# Altium PCB FPGA-Oscilloscope-route-01.PcbDoc (part 1 of 4)
Units mil, origin at the board's own origin, x right, y up, seen from the top; angles counter-clockwise.
Board outline 8300 x 5800 mil, 2 copper layers (Top Layer, Bottom Layer); 257 components, 397 nets, 1971 pads, 530 vias.
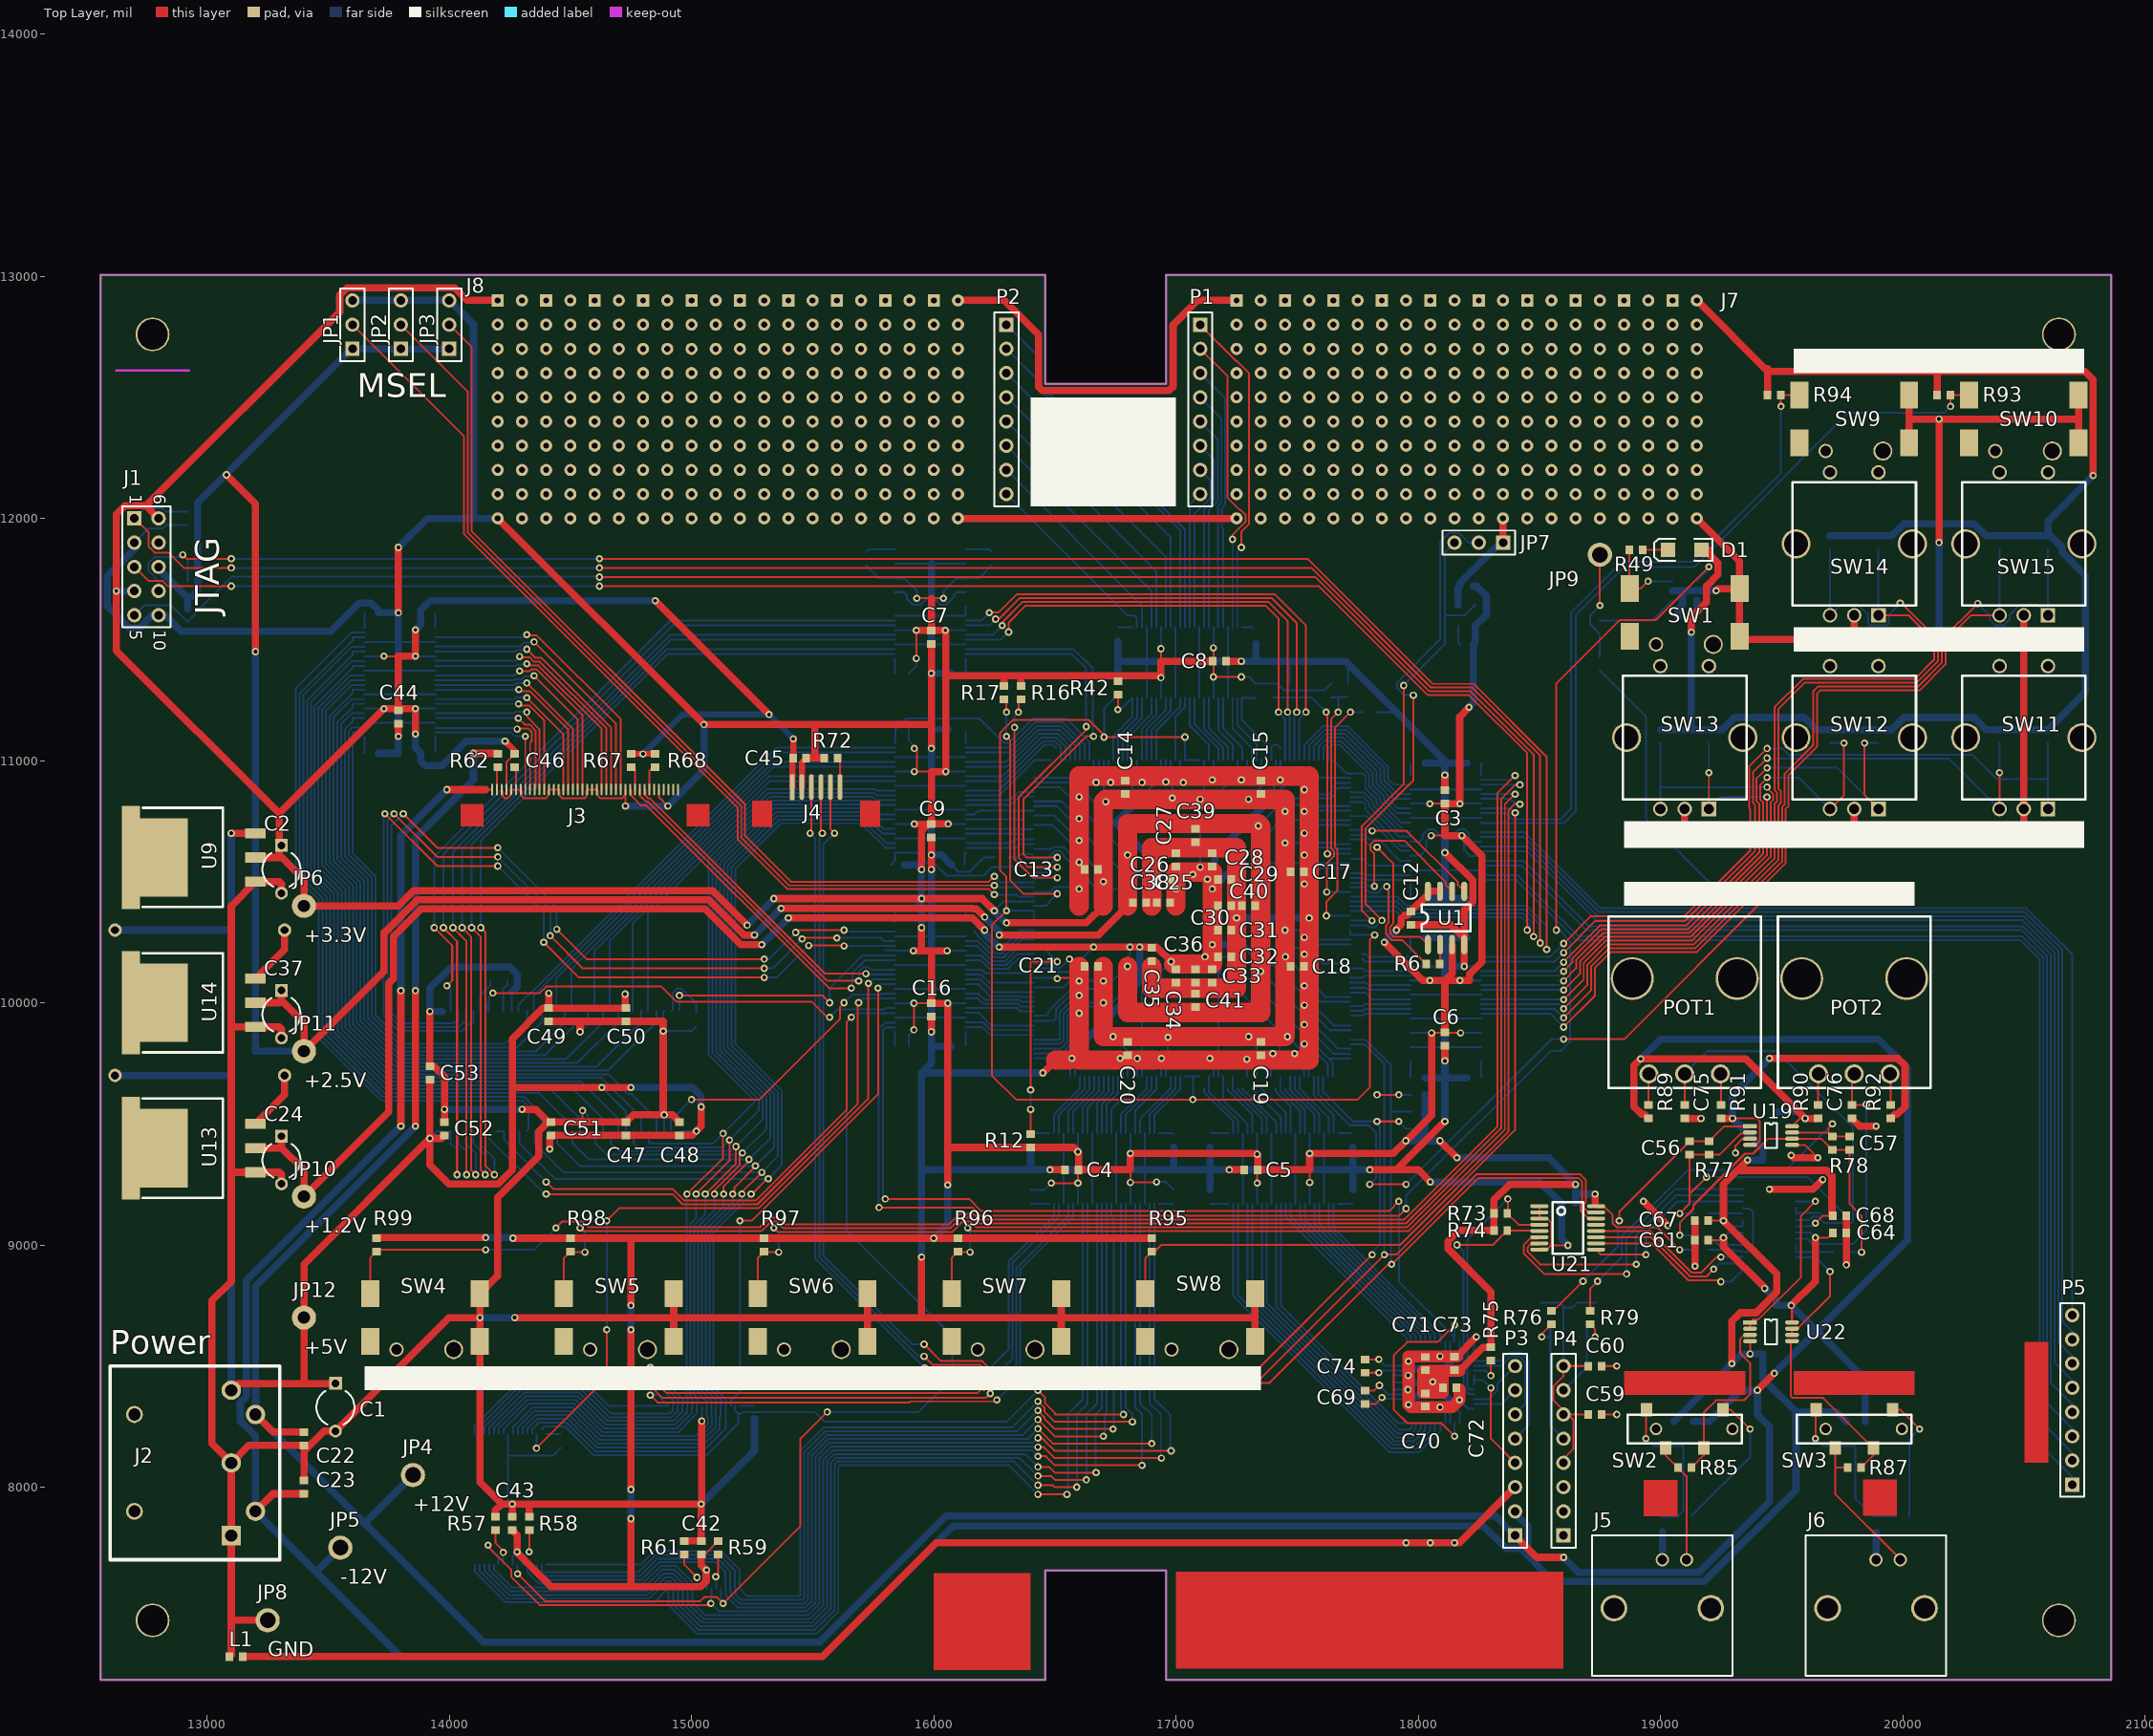
[diagram p0: Top Layer view]
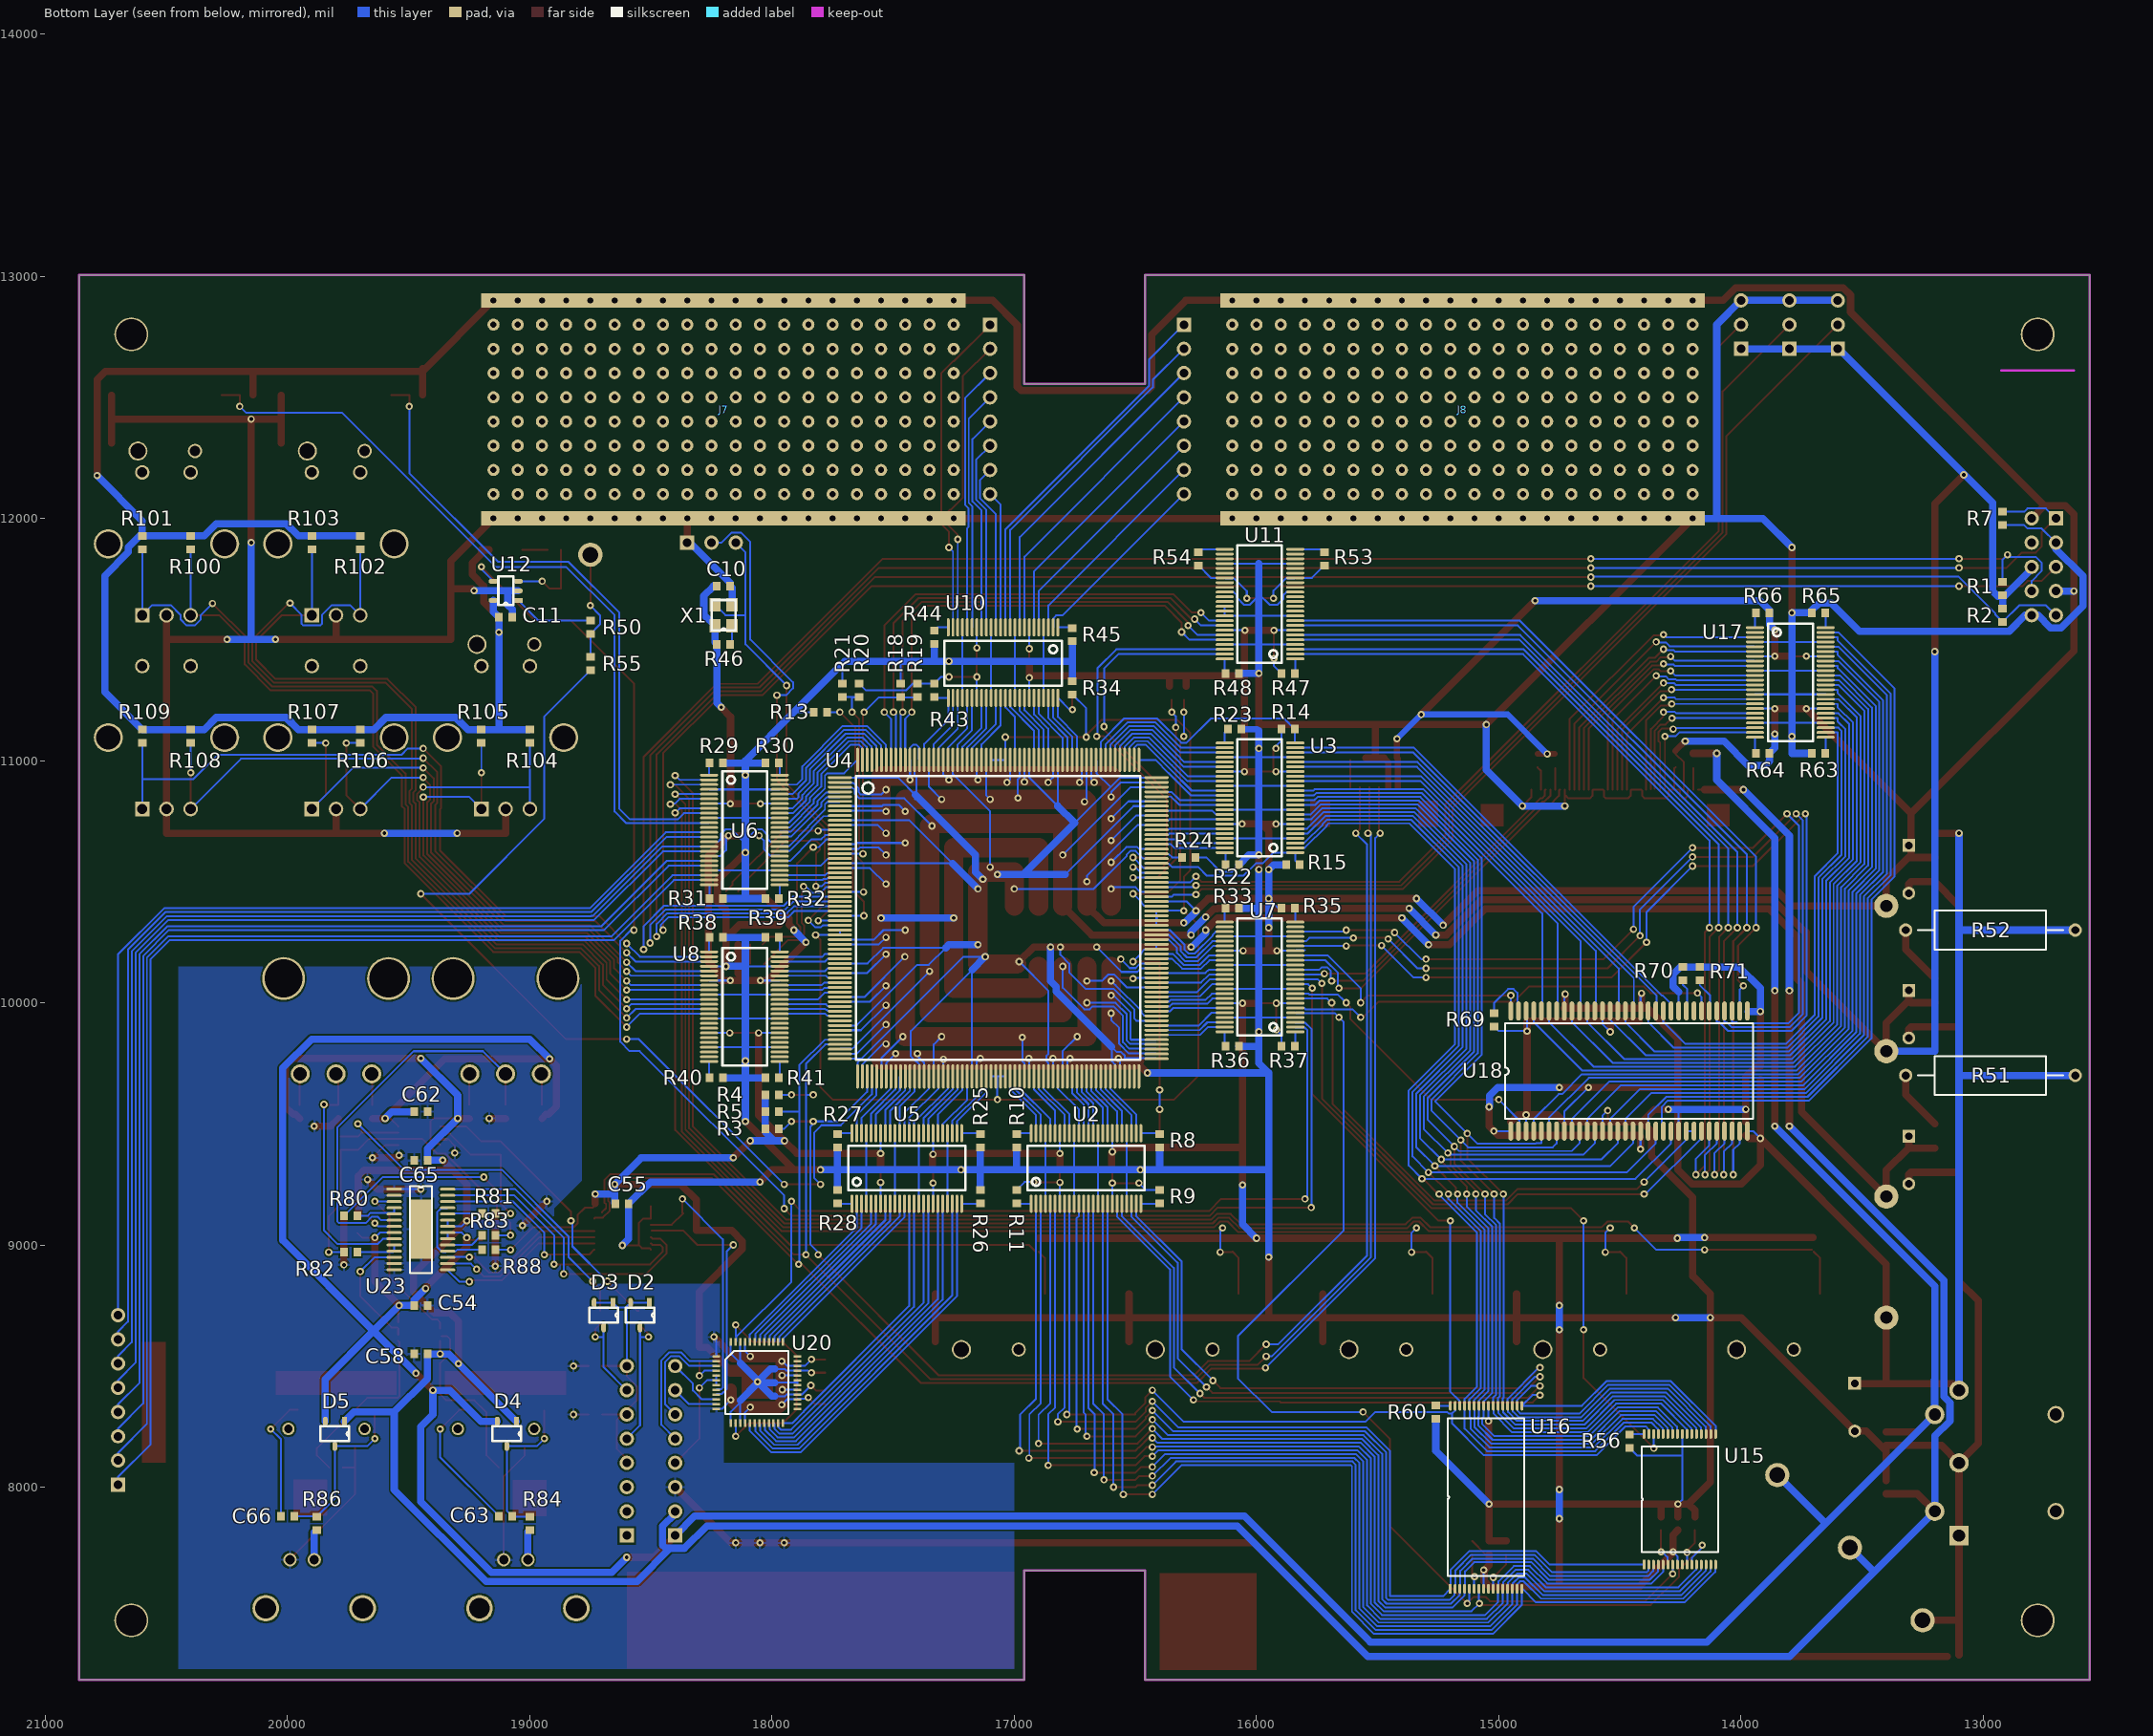
[diagram p1: Bottom Layer view, seen from below]

## Layer stack, top to bottom
Top Layer: signal copper 1.4
Dielectric: dielectric 12.6, FR-4, Dk 4.8
Bottom Layer: signal copper 1.4

## Board outline
12560,7205 12560,13005 16460,13005 16460,12555 16960,12555 16960,13005 20860,13005 20860,7205 16960,7205 16960,7655 16460,7655 16460,7205

## Design rules (kind name [scope] priority, off if disabled: settings)
Clearance [All] p1: gap=7.8
HoleSize [All] p1: absolutevalues=TRUE maxlimit=200 minlimit=1 maxpercent=80.000 minpercent=20.000
MinimumAnnularRing [All] p1: minimumring=7
MinimumSolderMaskSliver [All] p1: minsoldermaskwidth=1.5
PolygonConnect [All] p1: connectstyle=Relief reliefconductorwidth=10 reliefentries=4 polygonreliefangle="90 Angle" airgapwidth=10
RoutingVias [All] p1: holewidth=15 width=30 viastyle="Through Hole" minholewidth=15 minwidth=30 maxholewidth=15 maxwidth=30
SMDNeckDown [All] p1: percent=100.000
SilkToSilkClearance [All] p1 off: silktosilkclearance=10
SilkToSolderMaskClearance [IsPad] p1 off: minsilkscreentomaskgap=10 clearancetoexposedcopper=TRUE
SolderMaskExpansion [All] p1: expansion=4
Width Power [(InNet('GND') OR InNet('V12+') OR InNet('V12-') OR InNet('VCC') OR InNet('VCC5+') OR InNet('VCCA') OR InNet('VCCINT')) OR InNet('AGND')] p1: maxlimit=100 minlimit=8 preferedwidth=30 checkconnectedcopper=TRUE
Width [All] p2: maxlimit=30 minlimit=7.8 preferedwidth=7.8
24 further rules are at their usual default settings.

## Components (designator, comment, footprint, x,y, rotation, side; value= is the part's Value field where it differs from the comment)
C1 "47uF" CAPR5-4X5 13530,8330 r270 top
C2 "47uF" CAPR5-4X5 13307.09,10551.18 r270 top
C3 "0.1uF" 1608[0603] 18110,10850 r270 top
C4 "0.1uF" 1608[0603] 16570,9310 r0 top
C5 "0.1uF" 1608[0603] 17310,9310 r0 top
C6 "0.1uF" 1608[0603] 18110,9850 r90 top
C7 "0.1uF" 1608[0603] 15990,11510 r90 top
C8 "0.1uF" 1608[0603] 17180,11410 r180 top
C9 "0.1uF" 1608[0603] 15990,10710 r90 top
C10 "0.1uF" 1608[0603] 18200,11720 r0 bottom
C11 "0.1uF" 1608[0603] 19100,11591.65 r0 bottom
C12 "0.1uF" 1608[0603] 17970,10350 r90 top
C13 "0.1uF" 1608[0603] 16650,10550 r0 top
C14 "0.1uF" 1608[0603] 16790,10890 r270 top
C15 "0.1uF" 1608[0603] 17350,10890 r270 top
C16 "0.1uF" 1608[0603] 15990,9970 r90 top
C17 "0.1uF" 1608[0603] 17500,10540 r180 top
C18 "0.1uF" 1608[0603] 17500,10150 r180 top
C19 "0.1uF" 1608[0603] 17350,9810 r90 top
C20 "0.1uF" 1608[0603] 16800,9810 r90 top
C21 "0.1uF" 1608[0603] 16650,10150 r0 top
C22 "10uF" 1608[0603] 13400,8200 r90 top
C23 "10uF" 1608[0603] 13400,8000 r270 top
C24 "47uF" CAPR5-4X5 13307.09,9350.39 r270 top
C25 "0.1uF" 1608[0603] 16948.82,10413.39 r0 top
C26 "0.1uF" 1608[0603] 16950,10510 r0 top
C27 "0.1uF" 1608[0603] 17000,10590 r270 top
C28 "0.1uF" 1608[0603] 17150,10590 r270 top
C29 "0.1uF" 1608[0603] 17200,10510 r180 top
C30 "0.1uF" 1608[0603] 17200,10400 r180 top
C31 "0.1uF" 1608[0603] 17200,10300 r180 top
C32 "0.1uF" 1608[0603] 17200,10190 r180 top
C33 "0.1uF" 1608[0603] 17150,10110 r90 top
C34 "0.1uF" 1608[0603] 17000,10110 r90 top
C35 "0.1uF" 1608[0603] 16900,10200 r90 top
C36 "0.1uF" 1608[0603] 17080,10110 r90 top
C37 "47uF" CAPR5-4X5 13307.09,9952.76 r270 top
C38 "0.1uF" 1608[0603] 16850.39,10413.39 r180 top
C39 "0.1uF" 1608[0603] 17080,10690 r90 top
C40 "0.1uF" 1608[0603] 17300,10400 r0 top
C41 "0.1uF" 1608[0603] 17080,10010 r270 top
C42 "0.1uF" 1608[0603] 15040,7750 r270 top
C43 "0.1uF" 1608[0603] 14260,7850 r270 top
C44 "0.1uF" 1608[0603] 13790,11180 r90 top
C45 "0.1uF" 1608[0603] 15446.22,11010.63 r180 top
C46 "0.1uF" 1608[0603] 14270,11000 r90 top
C47 "0.1uF" 1608[0603] 14730,9480 r270 top
C48 "0.1uF" 1608[0603] 14950,9480 r270 top
C49 "0.1uF" 1608[0603] 14410,9950 r90 top
C50 "0.1uF" 1608[0603] 14730,9950 r90 top
C51 "0.1uF" 1608[0603] 14420,9480 r270 top
C52 "0.1uF" 1608[0603] 13980,9480 r270 top
C53 "1uF" 1608[0603] 13920,9710 r270 top
C54 "" 1608[0603] 19450,8750 r0 bottom
C55 "" 1608[0603] 18620,9170 r0 bottom
C56 "" 1608[0603] 19120,9400 r90 top
C57 "" 1608[0603] 19780,9420 r270 top
C58 "" 1608[0603] 19450,8550 r180 bottom
C59 "" 1608[0603] 18730,8300 r180 top
C60 "" 1608[0603] 18730,8500 r180 top
C61 "" 1608[0603] 19170,9020 r180 top
C62 "" 1608[0603] 19450,9550 r180 bottom
C63 "" 1608[0603] 19100,7880 r0 bottom
C64 "" 1608[0603] 19740,9050 r180 top
C65 "" 1608[0603] 19450,9350 r180 bottom
C66 "" 1608[0603] 20000,7880 r0 bottom
C67 "" 1608[0603] 19170,9100 r180 top
C68 "" 1608[0603] 19740,9120 r0 top
C69 "" 1608[0603] 17780,8370 r90 top
C70 "" 1608[0603] 18030,8360 r90 top
C71 "" 1608[0603] 18030,8510 r270 top
C72 "" 1608[0603] 18130,8410 r180 top
C73 "" 1608[0603] 18150,8510 r270 top
C74 "" 1608[0603] 17780,8500 r270 top
C75 "" 1608[0603] 19100,9550 r90 top
C76 "" 1608[0603] 19790,9550 r90 top
D1 "LED2" 3.2X1.6X1.1 19100,11870 r180 top
D2 "SMP1307" SOT-23-3 18490,8710 r270 bottom
D3 "SMP1307" SOT-23-3 18640,8710 r270 bottom
D4 "SMP1307" SOT-23-3 19040,8220 r270 bottom
D5 "SMP1307" SOT-23-3 19750,8220 r270 bottom
J1 "Header 5X2A" HDR2X5_CEN 12700,12000 r270 top
J2 "PS_CONN" DIN5 13300,7700 r180 top
J3 "DISP_CONN" MOLEX-40 14176.22,10880.63 r0 top
J4 "TOUCH_CONN" MOLEX-6 15416.22,10890.63 r0 top
J5 "BNC" AMP31-5540 19007.87,7700 r0 top
J6 "BNC" AMP31-5540 19890,7700 r0 top
J7 "Playground" 20x20 17250,12900 r0 top
J8 "Playground" 20x20 14200,12900 r0 top
JP1 "Header 3" HDR1X3 13600,12700 r90 top
JP2 "Header 3" HDR1X3 13800,12700 r90 top
JP3 "Header 3" HDR1X3 14000,12700 r90 top
JP4 "TestPoint" TestPoint#1 13850,8050 r0 top
JP5 "TestPoint" TestPoint#1 13550,7750 r0 top
JP6 "TestPoint" TestPoint#2 13400,10400 r0 top
JP7 "Header 3" HDR1X3 18350,11900 r180 top
JP8 "TestPoint" TestPoint#1 13250,7450 r0 top
JP9 "TestPoint" TestPoint#1 18750,11850 r0 top
JP10 "TestPoint" TestPoint#2 13400,9200 r0 top
JP11 "TestPoint" TestPoint#2 13400,9800 r0 top
JP12 "TestPoint" TestPoint#2 13400,8700 r0 top
L1 "Ferrite Bead" 1608[0603] 13120,7300 r0 top
P1 "Header 8" HDR1X8 17100,12800 r270 top
P2 "Header 8" HDR1X8 16300,12800 r270 top
P3 "Header 8" HDR1X8 18400,7800 r90 top
P4 "Header 8" HDR1X8 18600,7800 r90 top
P5 "Header 8" HDR1X8 20700,8010 r90 top
POT1 "10K" POT-3 19100,10100 r90 top
POT2 "10K" POT-3 19800,10100 r90 top
R1 "1K" 1608[0603] 12920,11710 r270 bottom
R2 "1K" 1608[0603] 12920,11600 r90 bottom
R3 "10K" 1608[0603] 17998.9,9480 r0 bottom
R4 "10K" 1608[0603] 18000,9620 r0 bottom
R5 "10K" 1608[0603] 18000,9550 r0 bottom
R6 "25" 1608[0603] 18060,10160 r0 top
R7 "1K" 1608[0603] 12920,12000 r90 bottom
R8 "10K" 1608[0603] 16400,9430 r270 bottom
R9 "10K" 1608[0603] 16400,9200 r90 bottom
R10 "10K" 1608[0603] 16990,9430 r270 bottom
R11 "10K" 1608[0603] 16990,9200 r90 bottom
R12 "10K" 1608[0603] 16400,9430 r90 top
R13 "10K" 1608[0603] 17800,11200 r180 bottom
R14 "10K" 1608[0603] 15870,11130 r180 bottom
R15 "10K" 1608[0603] 15850,10570 r180 bottom
R16 "10K" 1608[0603] 16360,11280 r270 top
R17 "10K" 1608[0603] 16290,11280 r270 top
R18 "10K" 1608[0603] 17470,11290 r270 bottom
R19 "10K" 1608[0603] 17400,11290 r270 bottom
R20 "10K" 1608[0603] 17640,11290 r270 bottom
R21 "10K" 1608[0603] 17710,11290 r270 bottom
R22 "10K" 1608[0603] 16100,10570 r180 bottom
R23 "10K" 1608[0603] 16090,11130 r180 bottom
R24 "10K" 1608[0603] 16280,10600 r0 bottom
R25 "10K" 1608[0603] 17140,9430 r270 bottom
R26 "10K" 1608[0603] 17140,9200 r90 bottom
R27 "10K" 1608[0603] 17730,9430 r270 bottom
R28 "10K" 1608[0603] 17730,9200 r90 bottom
R29 "10K" 1608[0603] 18230,10990 r180 bottom
R30 "10K" 1608[0603] 18000,10990 r0 bottom
R31 "10K" 1608[0603] 18230,10430 r180 bottom
R32 "10K" 1608[0603] 18000,10430 r0 bottom
R33 "10K" 1608[0603] 16100,10390 r180 bottom
R34 "10K" 1608[0603] 16760,11300 r270 bottom
R35 "10K" 1608[0603] 15870,10390 r0 bottom
R36 "10K" 1608[0603] 16100,9820 r180 bottom
R37 "10K" 1608[0603] 15870,9820 r0 bottom
R38 "10K" 1608[0603] 18230,10270 r180 bottom
R39 "10K" 1608[0603] 18000,10270 r0 bottom
R40 "10K" 1608[0603] 18230,9690 r180 bottom
R41 "10K" 1608[0603] 18000,9690 r0 bottom
R42 "10K" 1608[0603] 16760,11300 r270 top
R43 "10K" 1608[0603] 17330,11290 r270 bottom
R44 "10K" 1608[0603] 17330,11510 r270 bottom
R45 "10K" 1608[0603] 16760,11520 r270 bottom
R46 "10K" 1608[0603] 18200,11480 r180 bottom
R47 "10K" 1608[0603] 15870,11360 r0 bottom
R48 "10K" 1608[0603] 16100,11360 r180 bottom
R49 "100" 1608[0603] 18900,11870 r0 top
R50 "10K" 1608[0603] 18750,11550 r90 bottom
R51 "1" AXIAL-0.7 12970,9700 r180 bottom
R52 "1" AXIAL-0.7 12970,10300 r180 bottom
R53 "10K" 1608[0603] 15720,11833.4 r270 bottom
R54 "10K" 1608[0603] 16240,11833.4 r270 bottom
R55 "10K" 1608[0603] 18750,11400 r90 bottom
R56 "10K" 1608[0603] 14460,8190 r270 bottom
R57 "10K" 1608[0603] 14190,7850 r90 top
R58 "10K" 1608[0603] 14330,7850 r90 top
R59 "10K" 1608[0603] 15110,7750 r270 top
R60 "10K" 1608[0603] 15260,8310 r270 bottom
R61 "10K" 1608[0603] 14970,7750 r90 top
R62 "150" 1608[0603] 14200,11000 r270 top
R63 "10K" 1608[0603] 13680,11030 r180 bottom
R64 "10K" 1608[0603] 13910,11030 r0 bottom
R65 "10K" 1608[0603] 13680,11610 r180 bottom
R66 "10K" 1608[0603] 13910,11610 r0 bottom
R67 "10K" 1608[0603] 14750,11000 r90 top
R68 "10K" 1608[0603] 14850,11000 r90 top
R69 "10K" 1608[0603] 15020,9930 r270 bottom
R70 "10K" 1608[0603] 14240,10120 r90 bottom
R71 "10K" 1608[0603] 14170,10120 r90 bottom
R72 "10K" 1608[0603] 15576.22,11010.63 r0 top
R73 "10K" 1608[0603] 18340,9130 r0 top
R74 "10K" 1608[0603] 18340,9060 r0 top
R75 "10K" 1608[0603] 18300,8550 r270 top
R76 "1K" 1608[0603] 18550,8700 r270 top
R77 "10K" 1608[0603] 19200,9400 r90 top
R78 "10K" 1608[0603] 19710,9420 r270 top
R79 "1K" 1608[0603] 18710,8700 r270 top
R80 "2K" 1608[0603] 19740,9120 r180 bottom
R81 "20K" 1608[0603] 19170,9130 r0 bottom
R82 "2K" 1608[0603] 19740,8970 r180 bottom
R83 "20K" 1608[0603] 19170,9038.7 r0 bottom
R84 "1K" 1608[0603] 19000,7850 r90 bottom
R85 "1M" 1608[0603] 19100,8080 r180 top
R86 "1K" 1608[0603] 19880,7850 r90 bottom
R87 "1M" 1608[0603] 19800,8080 r180 top
R88 "10K" 1608[0603] 19170,8980 r180 bottom
R89 "47K" 1608[0603] 18950,9550 r90 top
R90 "47K" 1608[0603] 19650,9550 r90 top
R91 "47K" 1608[0603] 19250,9550 r90 top
R92 "47K" 1608[0603] 19950,9550 r90 top
R93 "10K" 1608[0603] 20170,12510 r180 top
R94 "10K" 1608[0603] 19470,12510 r180 top
R95 "10K" 1608[0603] 16900,9000 r90 top
R96 "10K" 1608[0603] 16100,9000 r90 top
R97 "10K" 1608[0603] 15300,9000 r90 top
R98 "10K" 1608[0603] 14500,9000 r90 top
R99 "10K" 1608[0603] 13700,9000 r90 top
R100 "10K" 1608[0603] 20400,11900 r90 bottom
R101 "10K" 1608[0603] 20600,11900 r90 bottom
R102 "10K" 1608[0603] 19700,11900 r90 bottom
R103 "10K" 1608[0603] 19900,11900 r90 bottom
R104 "10K" 1608[0603] 19000,11100 r90 bottom
R105 "10K" 1608[0603] 19200,11100 r90 bottom
R106 "10K" 1608[0603] 19700,11100 r90 bottom
R107 "10K" 1608[0603] 19900,11100 r90 bottom
R108 "10K" 1608[0603] 20400,11100 r90 bottom
R109 "10K" 1608[0603] 20600,11100 r90 bottom
SW1 "mom" SPDT 19100,11611.65 r180 top
SW2 "CL-SB-13B-02T" SP3T 19100,8240 r90 top
SW3 "CL-SB-13B-02T" SP3T 19800,8240 r90 top
SW4 "mom" SPDT 13900,8700 r180 top
SW5 "mom" SPDT 14700,8700 r180 top
SW6 "mom" SPDT 15500,8700 r180 top
SW7 "mom" SPDT 16300,8700 r180 top
SW8 "mom" SPDT 17100,8700 r180 top
SW9 "latch" SPDT 19800,12410 r180 top
SW10 "latch" SPDT 20500,12410 r180 top
SW11 "SW-ROTARY&PB" ROTENCPB 20600,10800 r180 top
SW12 "SW-ROTARY&PB" ROTENCPB 19900,10800 r180 top
SW13 "SW-ROTARY&PB" ROTENCPB 19200,10800 r180 top
SW14 "SW-ROTARY&PB" ROTENCPB 19900,11600 r180 top
SW15 "SW-ROTARY&PB" ROTENCPB 20600,11600 r180 top
U1 "EPCS1" SO-8 18040,10240 r90 top
U2 "74LVTH162245" TSSOP48 16930,9170 r180 bottom
U3 "74LVTH162245" TSSOP48 15840,10620 r90 bottom
U4 "EP3C25Q240" PQFP240 17720,10930 r180 bottom
U5 "74LVTH162245" TSSOP48 17670,9170 r180 bottom
U6 "74LVTH162245" TSSOP48 18260,10940 r270 bottom
U7 "74LVTH162245" TSSOP48 15840,9880 r90 bottom
U8 "74LVTH162245" TSSOP48 18260,10210 r270 bottom
U9 "LM1086" TO-263 13200,10500 r0 top
U10 "74LVTH162245" TSSOP48 16820,11550 r0 bottom
U11 "74LVTH162245" TSSOP48 15840,11420 r90 bottom
U12 "ADM8316" SOT-23 19060,11661.65 r0 bottom
U13 "LM1086" TO-263 13200,9300 r0 top
U14 "LM1086" TO-263 13200,9900 r0 top
U15 "SST39VF020" "TSOP-32 8x14mm" 14400,7680 r90 bottom
U16 "AS7C31024B" "TSOP-32 8x20mm" 15200,7580 r90 bottom
U17 "74LVTH162245" TSSOP48 13942.28,11548.98 r270 bottom
U18 "MSM5416283" SSOP64 14950,9470 r90 bottom
U19 "AD8066" MSOP-8 19370,9490 r0 top
U20 "AD9288" QFP24-7x7 18230,8540 r180 bottom
U21 "PCA9534" TSSOP16 18500,9160 r270 top
U22 "AD8066" MSOP-8 19370,8680 r0 top
U23 "THS7002" SOP28 19560,9230 r180 bottom
X1 "OSCOE" OSC-3.2x2.5 18200,11600 r90 bottom

## Footprints (in the part's own frame and the unit in brackets; to place one, negate y for a bottom-side part, rotate by r counter-clockwise, add the part's x,y. Pads: shape width x height; smd on the part's side, far side on the other; paste and mask are expansions set on the pad)
3.2X1.6X1.1 [mm] "SMT LED; 2 Flat Leads"
  rect 1.5x1.5 smd: 1(-1.75,0) 2(1.75,0)
  silkscreen extent -2.9,-1.15 3.2,1.15
20x20 [mil]
  round 50 hole 25: 2(0,-100) 2(200,-100) 2(400,-100) 2(600,-100) 2(800,-100) 2(1000,-100) 2(1200,-100) 2(1400,-100) 2(1600,-100) 2(1800,-100) 3(0,-200) 3(200,-200) 3(400,-200) 3(600,-200) 3(800,-200) 3(1000,-200) 3(1200,-200) 3(1400,-200) 3(1600,-200) 3(1800,-200) 4(0,-300) 4(200,-300) 4(400,-300) 4(600,-300) 4(800,-300) 4(1000,-300) 4(1200,-300) 4(1400,-300) 4(1600,-300) 4(1800,-300) 5(0,-400) 5(200,-400) 5(400,-400) 5(600,-400) 5(800,-400) 5(1000,-400) 5(1200,-400) 5(1400,-400) 5(1600,-400) 5(1800,-400) 6(0,-500) 6(200,-500) 6(400,-500) 6(600,-500) 6(800,-500) 6(1000,-500) 6(1200,-500) 6(1400,-500) 6(1600,-500) 6(1800,-500) 7(0,-600) 7(200,-600) 7(400,-600) 7(600,-600) 7(800,-600) 7(1000,-600) 7(1200,-600) 7(1400,-600) 7(1600,-600) 7(1800,-600) 8(0,-700) 8(200,-700) 8(400,-700) 8(600,-700) 8(800,-700) 8(1000,-700) 8(1200,-700) 8(1400,-700) 8(1600,-700) 8(1800,-700) 9(0,-800) 9(200,-800) 9(400,-800) 9(600,-800) 9(800,-800) 9(1000,-800) 9(1200,-800) 9(1400,-800) 9(1600,-800) 9(1800,-800) 12(100,-800) 12(300,-800) 12(500,-800) 12(700,-800) 12(900,-800) 12(1100,-800) 12(1300,-800) 12(1500,-800) 12(1700,-800) 12(1900,-800) 13(100,-700) 13(300,-700) 13(500,-700) 13(700,-700) 13(900,-700) 13(1100,-700) 13(1300,-700) 13(1500,-700) 13(1700,-700) 13(1900,-700) 14(100,-600) 14(300,-600) 14(500,-600) 14(700,-600) 14(900,-600) 14(1100,-600) 14(1300,-600) 14(1500,-600) 14(1700,-600) 14(1900,-600) 15(100,-500) 15(300,-500) 15(500,-500) 15(700,-500) 15(900,-500) 15(1100,-500) 15(1300,-500) 15(1500,-500) 15(1700,-500) 15(1900,-500) 16(100,-400) 16(300,-400) 16(500,-400) 16(700,-400) 16(900,-400) 16(1100,-400) 16(1300,-400) 16(1500,-400) 16(1700,-400) 16(1900,-400) 17(100,-300) 17(300,-300) 17(500,-300) 17(700,-300) 17(900,-300) 17(1100,-300) 17(1300,-300) 17(1500,-300) 17(1700,-300) 17(1900,-300) 18(100,-200) 18(300,-200) 18(500,-200) 18(700,-200) 18(900,-200) 18(1100,-200) 18(1300,-200) 18(1500,-200) 18(1700,-200) 18(1900,-200) 19(100,-100) 19(300,-100) 19(500,-100) 19(700,-100) 19(900,-100) 19(1100,-100) 19(1300,-100) 19(1500,-100) 19(1700,-100) 19(1900,-100) PGGND(0,-900) PGGND(100,-900) PGGND(200,-900) PGGND(300,-900) PGGND(400,-900) PGGND(500,-900) PGGND(600,-900) PGGND(700,-900) PGGND(800,-900) PGGND(900,-900) PGGND(1000,-900) PGGND(1100,-900) PGGND(1200,-900) PGGND(1300,-900) PGGND(1400,-900) PGGND(1500,-900) PGGND(1600,-900) PGGND(1700,-900) PGGND(1800,-900) PGGND(1900,-900) PGVCC(100,0) PGVCC(300,0) PGVCC(500,0) PGVCC(700,0) PGVCC(900,0) PGVCC(1100,0) PGVCC(1300,0) PGVCC(1500,0) PGVCC(1700,0) PGVCC(1900,0)
  rect 2000x60 smd far side: PGGND(950,-900) PGVCC(950,0)
  rect 50x50 hole 25: PGVCC(0,0) PGVCC(200,0) PGVCC(400,0) PGVCC(600,0) PGVCC(800,0) PGVCC(1000,0) PGVCC(1200,0) PGVCC(1400,0) PGVCC(1600,0) PGVCC(1800,0)
1608[0603] [mm] "Chip Capacitor, Body 1.6x0.8mm, IPC High Density"
  rect 0.8x0.9 smd: 1(-0.7,0) 2(0.7,0)
  body extent -0.87,-0.48 0.87,0.48, height 1.3
AMP31-5540 [mil]
  round 55 hole 38: 1(0,0) 2(100,0)
  round 110 hole 86: ""(-200,-200) ""(200,-200)
  silkscreen extent -290,-480 290,100
AXIAL-0.7 [mm] "Axial Device, Thru-Hole; 2 Leads; 0.7 in Pin Spacing"
  round 1.4 hole 0.85: 1(-8.89,0) 2(8.89,0)
  silkscreen extent -7.62,-2.03 7.62,2.03
CAPR5-4X5 [mm] "Capacitor; 2 Leads"
  rect 1.35x1.35 hole 0.8: 1(-2.5,0)
  round 1.35 hole 0.8: 2(2.5,0)
  silkscreen extent -1.69,-2 1.82,2
DIN5 [mil]
  rect 80x80 hole 50: 1(200,-100)
  round 80 hole 50: 2(100,-200) 3(200,-400) 4(100,-600) 5(200,-700)
  round 70 hole 50: ""(600,-200) ""(600,-600)
  silkscreen extent 0,-800 700,0
HDR1X3 [mm] "Connector; Header; 3 Position"
  rect 1.5x1.5 hole 0.9: 1(0,0)
  round 1.5 hole 0.9: 2(2.54,0) 3(5.08,0)
  silkscreen extent -1.27,-1.27 6.35,1.27
HDR1X8 [mm] "Connector; Header; 8 Position"
  rect 1.5x1.5 hole 0.9: 1(0,0)
  round 1.5 hole 0.9: 2(2.54,0) 3(5.08,0) 4(7.62,0) 5(10.16,0) 6(12.7,0) 7(15.24,0) 8(17.78,0)
  silkscreen extent -1.27,-1.27 19.05,1.27
HDR2X5_CEN [mm] "Connector; Header; 5x2 Position"
  rect 1.5x1.5 hole 0.9: 1(0,0)
  round 1.5 hole 0.9: 2(2.54,0) 3(5.08,0) 4(7.62,0) 5(10.16,0) 6(0,2.54) 7(2.54,2.54) 8(5.08,2.54) 9(7.62,2.54) 10(10.16,2.54)
  silkscreen extent -1.27,-1.27 11.43,3.81
MOLEX-6 [mm]
  rect 0.5x2.7 smd: 1(0,0)
  oval 0.5x2.7 smd: 2(1,0) 3(2,0) 4(3,0) 5(4,0) 6(5,0)
  Top Layer region: 7.1,-4.2 9.2,-4.2 9.2,-1.4 7.1,-1.4
  Top Layer region: -4.2,-4.2 -2.1,-4.2 -2.1,-1.4 -4.2,-1.4
MOLEX-40 [mm]
  rect 0.2x1.2 smd: 1(0,0) 10(4.5,0) 20(9.5,0) 30(14.5,0) 40(19.5,0)
  oval 0.2x1.2 smd: 2(0.5,0) 3(1,0) 4(1.5,0) 5(2,0) 6(2.5,0) 7(3,0) 8(3.5,0) 9(4,0) 11(5,0) 12(5.5,0) 13(6,0) 14(6.5,0) 15(7,0) 16(7.5,0) 17(8,0) 18(8.5,0) 19(9,0) 21(10,0) 22(10.5,0) 23(11,0) 24(11.5,0) 25(12,0) 26(12.5,0) 27(13,0) 28(13.5,0) 29(14,0) 31(15,0) 32(15.5,0) 33(16,0) 34(16.5,0) 35(17,0) 36(17.5,0) 37(18,0) 38(18.5,0) 39(19,0)
  Top Layer region: 20.4,-3.9 22.8,-3.9 22.8,-1.5 20.4,-1.5
  Top Layer region: -3.3,-3.9 -0.9,-3.9 -0.9,-1.5 -3.3,-1.5
MSOP-8 [mm]
  rect 1.45x0.45 smd: 1(0,0)
  oval 1.45x0.45 smd: 2(0,-0.65) 3(0,-1.3) 4(0,-1.95) 5(4.4,-1.95) 6(4.4,-1.3) 7(4.4,-0.65) 8(4.4,0)
  silkscreen extent 1.56,-2.28 2.84,0.33
OSC-3.2x2.5 [mm]
  rect 1.4x1.2 smd: 1(-1.1,-0.9) 2(1.1,-0.9) 3(1.1,0.9) 4(-1.1,0.9)
  silkscreen extent -1.6,-1.25 1.6,1.25
POT-3 [mm]
  round 2 hole 1.4: 1(-10,3.75) 2(-10,0) 3(-10,-3.75)
  round 4.5 hole 4: ""(0,5.5) ""(0,-5.5)
  silkscreen extent -11.5,-8 6.5,8
PQFP240 [mm]
  oval 2.54x0.3 smd: 1(0,0) 2(0,-0.5) 3(0,-1) 4(0,-1.5) 5(0,-2) 6(0,-2.5) 7(0,-3) 8(0,-3.5) 9(0,-4) 10(0,-4.5) 11(0,-5) 12(0,-5.5) 13(0,-6) 14(0,-6.5) 15(0,-7) 16(0,-7.5) 17(0,-8) 18(0,-8.5) 19(0,-9) 20(0,-9.5) 21(0,-10) 22(0,-10.5) 23(0,-11) 24(0,-11.5) 25(0,-12) 26(0,-12.5) 27(0,-13) 28(0,-13.5) 29(0,-14) 30(0,-14.5) 31(0,-15) 32(0,-15.5) 33(0,-16) 34(0,-16.5) 35(0,-17) 36(0,-17.5) 37(0,-18) 38(0,-18.5) 39(0,-19) 40(0,-19.5) 41(0,-20) 42(0,-20.5) 43(0,-21) 44(0,-21.5) 45(0,-22) 46(0,-22.5) 47(0,-23) 48(0,-23.5) 49(0,-24) 50(0,-24.5) 51(0,-25) 52(0,-25.5) 53(0,-26) 54(0,-26.5) 55(0,-27) 56(0,-27.5) 57(0,-28) 58(0,-28.5) 59(0,-29) 60(0,-29.5) 121(33.2,-29.5) 122(33.2,-29) 123(33.2,-28.5) 124(33.2,-28) 125(33.2,-27.5) 126(33.2,-27) 127(33.2,-26.5) 128(33.2,-26) 129(33.2,-25.5) 130(33.2,-25) 131(33.2,-24.5) 132(33.2,-24) 133(33.2,-23.5) 134(33.2,-23) 135(33.2,-22.5) 136(33.2,-22) 137(33.2,-21.5) 138(33.2,-21) 139(33.2,-20.5) 140(33.2,-20) 141(33.2,-19.5) 142(33.2,-19) 143(33.2,-18.5) 144(33.2,-18) 145(33.2,-17.5) 146(33.2,-17) 147(33.2,-16.5) 148(33.2,-16) 149(33.2,-15.5) 150(33.2,-15) 151(33.2,-14.5) 152(33.2,-14) 153(33.2,-13.5) 154(33.2,-13) 155(33.2,-12.5) 156(33.2,-12) 157(33.2,-11.5) 158(33.2,-11) 159(33.2,-10.5) 160(33.2,-10) 161(33.2,-9.5) 162(33.2,-9) 163(33.2,-8.5) 164(33.2,-8) 165(33.2,-7.5) 166(33.2,-7) 167(33.2,-6.5) 168(33.2,-6) 169(33.2,-5.5) 170(33.2,-5) 171(33.2,-4.5) 172(33.2,-4) 173(33.2,-3.5) 174(33.2,-3) 175(33.2,-2.5) 176(33.2,-2) 177(33.2,-1.5) 178(33.2,-1) 179(33.2,-0.5) 180(33.2,0)
  oval 0.3x2.54 smd: 61(1.85,-31.35) 62(2.35,-31.35) 63(2.85,-31.35) 64(3.35,-31.35) 65(3.85,-31.35) 66(4.35,-31.35) 67(4.85,-31.35) 68(5.35,-31.35) 69(5.85,-31.35) 70(6.35,-31.35) 71(6.85,-31.35) 72(7.35,-31.35) 73(7.85,-31.35) 74(8.35,-31.35) 75(8.85,-31.35) 76(9.35,-31.35) 77(9.85,-31.35) 78(10.35,-31.35) 79(10.85,-31.35) 80(11.35,-31.35) 81(11.85,-31.35) 82(12.35,-31.35) 83(12.85,-31.35) 84(13.35,-31.35) 85(13.85,-31.35) 86(14.35,-31.35) 87(14.85,-31.35) 88(15.35,-31.35) 89(15.85,-31.35) 90(16.35,-31.35) 91(16.85,-31.35) 92(17.35,-31.35) 93(17.85,-31.35) 94(18.35,-31.35) 95(18.85,-31.35) 96(19.35,-31.35) 97(19.85,-31.35) 98(20.35,-31.35) 99(20.85,-31.35) 100(21.35,-31.35) 101(21.85,-31.35) 102(22.35,-31.35) 103(22.85,-31.35) 104(23.35,-31.35) 105(23.85,-31.35) 106(24.35,-31.35) 107(24.85,-31.35) 108(25.35,-31.35) 109(25.85,-31.35) 110(26.35,-31.35) 111(26.85,-31.35) 112(27.35,-31.35) 113(27.85,-31.35) 114(28.35,-31.35) 115(28.85,-31.35) 116(29.35,-31.35) 117(29.85,-31.35) 118(30.35,-31.35) 119(30.85,-31.35) 120(31.35,-31.35) 181(31.35,1.85) 182(30.85,1.85) 183(30.35,1.85) 184(29.85,1.85) 185(29.35,1.85) 186(28.85,1.85) 187(28.35,1.85) 188(27.85,1.85) 189(27.35,1.85) 190(26.85,1.85) 191(26.35,1.85) 192(25.85,1.85) 193(25.35,1.85) 194(24.85,1.85) 195(24.35,1.85) 196(23.85,1.85) 197(23.35,1.85) 198(22.85,1.85) 199(22.35,1.85) 200(21.85,1.85) 201(21.35,1.85) 202(20.85,1.85) 203(20.35,1.85) 204(19.85,1.85) 205(19.35,1.85) 206(18.85,1.85) 207(18.35,1.85) 208(17.85,1.85) 209(17.35,1.85) 210(16.85,1.85) 211(16.35,1.85) 212(15.85,1.85) 213(15.35,1.85) 214(14.85,1.85) 215(14.35,1.85) 216(13.85,1.85) 217(13.35,1.85) 218(12.85,1.85) 219(12.35,1.85) 220(11.85,1.85) 221(11.35,1.85) 222(10.85,1.85) 223(10.35,1.85) 224(9.85,1.85) 225(9.35,1.85) 226(8.85,1.85) 227(8.35,1.85) 228(7.85,1.85) 229(7.35,1.85) 230(6.85,1.85) 231(6.35,1.85) 232(5.85,1.85) 233(5.35,1.85) 234(4.85,1.85) 235(4.35,1.85) 236(3.85,1.85) 237(3.35,1.85) 238(2.85,1.85) 239(2.35,1.85) 240(1.85,1.85)
  silkscreen extent 1.7,-29.62 31.5,0.15
QFP24-7x7 [mm]
  oval 0.8x0.25 smd: 1(0,0)
  rect 0.8x0.25 smd: 2(0,-0.5) 3(0,-1) 4(0,-1.5) 5(0,-2) 6(0,-2.5) 7(0,-3) 8(0,-3.5) 9(0,-4) 10(0,-4.5) 11(0,-5) 12(0,-5.5) 25(8.5,-5.5) 26(8.5,-5) 27(8.5,-4.5) 28(8.5,-4) 29(8.5,-3.5) 30(8.5,-3) 31(8.5,-2.5) 32(8.5,-2) 33(8.5,-1.5) 34(8.5,-1) 35(8.5,-0.5) 36(8.5,0)
  rect 0.25x0.8 smd: 13(1.5,-7) 14(2,-7) 15(2.5,-7) 16(3,-7) 17(3.5,-7) 18(4,-7) 19(4.5,-7) 20(5,-7) 21(5.5,-7) 22(6,-7) 23(6.5,-7) 24(7,-7) 37(7,1.5) 38(6.5,1.5) 39(6,1.5) 40(5.5,1.5) 41(5,1.5) 42(4.5,1.5) 43(4,1.5) 44(3.5,1.5) 45(3,1.5) 46(2.5,1.5) 47(2,1.5) 48(1.5,1.5)
  silkscreen extent 0.93,-6.07 7.56,0.56
ROTENCPB [mil]
  rect 60x60 hole 42: 1(0,0)
  round 60 hole 42: 2(100,0) 3(200,0) 4(200,-590) 5(0,-590)
  round 120 hole 100: ""(-140,-295) ""(340,-295)
  silkscreen extent -155,-550 355,-40
SO-8 [mil]
  oval 80x24 smd: 1(0,0) 2(0,-50) 3(0,-100) 4(0,-150) 5(220,-150) 6(220,-100) 7(220,-50) 8(220,0)
  silkscreen extent 55,-175 165,25
SOP28 [mm]
  rect 1.6x0.3 smd: 1(0,0)
  oval 1.6x0.3 smd: 2(0,-0.65) 3(0,-1.3) 4(0,-1.95) 5(0,-2.6) 6(0,-3.25) 7(0,-3.9) 8(0,-4.55) 9(0,-5.2) 10(0,-5.85) 11(0,-6.5) 12(0,-7.15) 13(0,-7.8) 14(0,-8.45) 15(5.6,-8.45) 16(5.6,-7.8) 17(5.6,-7.15) 18(5.6,-6.5) 19(5.6,-5.85) 20(5.6,-5.2) 21(5.6,-4.55) 22(5.6,-3.9) 23(5.6,-3.25) 24(5.6,-2.6) 25(5.6,-1.95) 26(5.6,-1.3) 27(5.6,-0.65) 28(5.6,0)
  rect 2.4x6.2 smd: PGND(2.8,-4.2)
  silkscreen extent 1.63,-8.78 3.97,0.33
SOT-23 [mm]
  rect 1x0.5 smd: 1(-0.3,0)
  oval 1x0.5 smd: 2(-0.3,-1) 3(-0.3,-2) 4(2.3,-2) 5(2.3,0)
  silkscreen extent 0.2,-2.5 1.78,0.5
SOT-23-3 [mm]
  rect 1x0.5 smd: 1(-1.3,-0.4)
  oval 1x0.5 smd: 2(-1.3,-2.4) 3(1.3,-1.4)
  silkscreen extent -0.8,-2.9 0.78,0.1
SP3T [mm]
  rect 1.4x1.2 smd: 1(2,4) 2(-2,2) 3(-2,-2) 4(2,-4)
  round 1.3 hole 0.9: ""(0,3) ""(0,-5)
  silkscreen extent -1.5,-6 1.5,6
SPDT [mm]
  rect 1.9x2.8 smd: 1(5.75,2.5) 2(5.75,-2.5) C(-5.75,-2.5) C(-5.75,2.5)
  round 2 hole 1.6: ""(-3,3.35)
  round 1.5 hole 1.1: ""(3,3.35)
SSOP64 [mm]
  oval 2x0.5 smd: 1(0,0) 2(0,-0.8) 3(0,-1.6) 4(0,-2.4) 5(0,-3.2) 6(0,-4) 7(0,-4.8) 8(0,-5.6) 9(0,-6.4) 10(0,-7.2) 11(0,-8) 12(0,-8.8) 13(0,-9.6) 14(0,-10.4) 15(0,-11.2) 16(0,-12) 17(0,-12.8) 18(0,-13.6) 19(0,-14.4) 20(0,-15.2) 21(0,-16) 22(0,-16.8) 23(0,-17.6) 24(0,-18.4) 25(0,-19.2) 26(0,-20) 27(0,-20.8) 28(0,-21.6) 29(0,-22.4) 30(0,-23.2) 31(0,-24) 32(0,-24.8) 33(12.6,-24.8) 34(12.6,-24) 35(12.6,-23.2) 36(12.6,-22.4) 37(12.6,-21.6) 38(12.6,-20.8) 39(12.6,-20) 40(12.6,-19.2) 41(12.6,-18.4) 42(12.6,-17.6) 43(12.6,-16.8) 44(12.6,-16) 45(12.6,-15.2) 46(12.6,-14.4) 47(12.6,-13.6) 48(12.6,-12.8) 49(12.6,-12) 50(12.6,-11.2) 51(12.6,-10.4) 52(12.6,-9.6) 53(12.6,-8.8) 54(12.6,-8) 55(12.6,-7.2) 56(12.6,-6.4) 57(12.6,-5.6) 58(12.6,-4.8) 59(12.6,-4) 60(12.6,-3.2) 61(12.6,-2.4) 62(12.6,-1.6) 63(12.6,-0.8) 64(12.6,0)
  silkscreen extent 1.3,-25.4 11.3,0.6
TestPoint#1 [mil]
  round 100 hole 65: 1(0,0)
TestPoint#2 [mil]
  round 100 hole 50: 1(0,0)
TO-263 [mil]
  rect 85x42 smd: 1(0,0) 2(0,100) 3(0,200)
  rect 75x425 smd: ""(-515,100)
  rect 200x325 smd: ""(-380,100)
  silkscreen extent -465,-105 -135,305
"TSOP-32 8x14mm" [mm] "Use with SST39VF020"
  rect 1x0.3 smd: 1(0,0)
  oval 1x0.3 smd: 2(0,-0.5) 3(0,-1) 4(0,-1.5) 5(0,-2) 6(0,-2.5) 7(0,-3) 8(0,-3.5) 9(0,-4) 10(0,-4.5) 11(0,-5) 12(0,-5.5) 13(0,-6) 14(0,-6.5) 15(0,-7) 16(0,-7.5) 17(13.7,-7.5) 18(13.7,-7) 19(13.7,-6.5) 20(13.7,-6) 21(13.7,-5.5) 22(13.7,-5) 23(13.7,-4.5) 24(13.7,-4) 25(13.7,-3.5) 26(13.7,-3) 27(13.7,-2.5) 28(13.7,-2) 29(13.7,-1.5) 30(13.7,-1) 31(13.7,-0.5) 32(13.7,0)
  silkscreen extent 1.34,-7.75 12.37,0.25
"TSOP-32 8x20mm" [mm] "Use with AS7C31024B"
  rect 1x0.3 smd: 1(0,0)
  oval 1x0.3 smd: 2(0,-0.5) 3(0,-1) 4(0,-1.5) 5(0,-2) 6(0,-2.5) 7(0,-3) 8(0,-3.5) 9(0,-4) 10(0,-4.5) 11(0,-5) 12(0,-5.5) 13(0,-6) 14(0,-6.5) 15(0,-7) 16(0,-7.5) 17(19.2,-7.5) 18(19.2,-7) 19(19.2,-6.5) 20(19.2,-6) 21(19.2,-5.5) 22(19.2,-5) 23(19.2,-4.5) 24(19.2,-4) 25(19.2,-3.5) 26(19.2,-3) 27(19.2,-2.5) 28(19.2,-2) 29(19.2,-1.5) 30(19.2,-1) 31(19.2,-0.5) 32(19.2,0)
  silkscreen extent 1.33,-7.75 17.86,0.25
TSSOP16 [mm]
  oval 0.4x1.9 smd: 1(0,0) 2(0.65,0) 3(1.3,0) 4(1.95,0) 5(2.6,0) 6(3.25,0) 7(3.9,0) 8(4.55,0) 9(4.55,5.95) 10(3.9,5.95) 11(3.25,5.95) 12(2.6,5.95) 13(1.95,5.95) 14(1.3,5.95) 15(0.65,5.95) 16(0,5.95)
  silkscreen extent -0.4,1.4 5,4.6
TSSOP48 [mm]
  oval 0.3x1.9 smd: 1(0,0) 2(0.5,0) 3(1,0) 4(1.5,0) 5(2,0) 6(2.5,0) 7(3,0) 8(3.5,0) 9(4,0) 10(4.5,0) 11(5,0) 12(5.5,0) 13(6,0) 14(6.5,0) 15(7,0) 16(7.5,0) 17(8,0) 18(8.5,0) 19(9,0) 20(9.5,0) 21(10,0) 22(10.5,0) 23(11,0) 24(11.5,0) 25(11.5,7.4) 26(11,7.4) 27(10.5,7.4) 28(10,7.4) 29(9.5,7.4) 30(9,7.4) 31(8.5,7.4) 32(8,7.4) 33(7.5,7.4) 34(7,7.4) 35(6.5,7.4) 36(6,7.4) 37(5.5,7.4) 38(5,7.4) 39(4.5,7.4) 40(4,7.4) 41(3.5,7.4) 42(3,7.4) 43(2.5,7.4) 44(2,7.4) 45(1.5,7.4) 46(1,7.4) 47(0.5,7.4) 48(0,7.4)
  silkscreen extent -0.4,1.4 11.9,6.1

## Part data
C1 C2 C24 C37: library part "Cap Pol1", "Polarized Capacitor (Radial)"
C3 C4 C5 C6 C7 C8 C9 C10 C11 C12 C13 C14 C15 C16 C17 C18 C19 C20 C21 C22 C23 C25 C26 C27 C28 C29 C30 C31 C32 C33 C34 C35 C36 C38 C39 C40 C41 C42 C43 C44 C45 C46 C47 C48 C49 C50 C51 C52 C53 C54 C55 C56 C57 C58 C59 C60 C61 C62 C63 C64 C65 C66 C67 C68 C69 C70 C71 C72 C73 C74 C75 C76: library part "Cap Semi", "Capacitor (Semiconductor SIM Model)"
D1: "Typical RED, GREEN, YELLOW, AMBER GaAs LED"
D2 D3 D4 D5: library part SMP1307-005LF
J1: "Header, 5-Pin, Dual row"
J2: "Elpac Compatible Power Supply Connector"
J3: library part NHD-4.3-Display-connector
J4: library part NHD-4.3-Touch-connector
J5 J6: "BNC Connector"
JP1 JP2 JP3 JP7: "Header, 3-Pin"
L1: library part Inductor, "Inductor"
P1 P2 P3 P4 P5: "Header, 8-Pin"
POT1 POT2: library part Potentiometer
R1 R2 R3 R4 R5 R6 R7 R8 R9 R10 R11 R12 R13 R14 R15 R16 R17 R18 R19 R20 R21 R22 R23 R24 R25 R26 R27 R28 R29 R30 R31 R32 R33 R34 R35 R36 R37 R38 R39 R40 R41 R42 R43 R44 R45 R46 R47 R48 R49 R50 R51 R52 R53 R54 R55 R56 R57 R58 R59 R60 R61 R62 R63 R64 R65 R66 R67 R68 R69 R70 R71 R72 R73 R74 R75 R76 R77 R78 R79 R80 R81 R82 R83 R84 R85 R86 R87 R88 R89 R90 R91 R92 R93 R94 R95 R96 R97 R98 R99 R100 R101 R102 R103 R104 R105 R106 R107 R108 R109: library part RES1
SW1 SW4 SW5 SW6 SW7 SW8: library part PVB4-MOM
SW9 SW10: library part PVB4-LATCH
SW11 SW12 SW13 SW14 SW15: "Rotary Encoder with Built-In Push Button"
U1: "Altera Serial Configuration Device"
U2 U3 U5 U6 U7 U8 U10 U11 U17: "16-Bit Bus Transceiver"
U4: "Cyclone III EP3C-25 FPGA PQFP240"
U9 U13 U14: "1.5A Low Dropout Positive Regulator"
U12: "Analog Devices Watchdog Timer and Reset IC"
U15: "Microchip 2 Mbit (256k x 8 bit) Multi-Purpose Flash"
U16: "Alliance 1 Mbit (128k x 8bit) SRAM"
U18: "256K x 16bit VRAM"
U20: "Dual Channel ADC"
X1: "Oscillator with Active High Output Enable"

## Free pads (board coordinates)
  round 140 hole 125: 1(12775,7450) 2(12775,12760) 3(20645,7450) 4(20645,12760)

## Via types
v1: diameter 30, hole 15, Top Layer to Bottom Layer, 530 vias

## Nets (pads, with @x,y where several pads share a name; then routed paths per layer and width w, separated by ;. In a path a pad name is that pad's centre, name@x,y a point inside that pad or via, vN(x,y) a via of type N, cw(c..) or ccw(c..) an arc to the next point about the centre after c; other vN are vias at no path point)
AB0: U2.23 U15.20 U16.20 | length 3450.1
  Top Layer w7.8: v1(14830,8493.4) 14914.35,8409.05 16149.05,8409.05 v1(16180,8440)
  Bottom Layer w7.8: U15.20@14163.78,8219.37 14165.86,8221.45 14165.86,8247.57 14309.44,8391.16 14534.97,8391.16 14652.8,8273.32 14924.94,8273.32 14961.7,8310.08 14961.7,8333.83 U16.20@14963.78,8335.91 14963.78,8364.75 14835.13,8493.4 v1(14830,8493.4) ; v1(16180,8440) 16310,8570 16310,8933.07 16496.93,9120 U2.23@16496.93,9170
AB1: U2.22 U15.19 U16.19 | length 3453.4
  Top Layer w7.8: v1(14830,8455.6) 14896.23,8389.37 16182.83,8389.37 v1(16206.73,8413.27)
  Bottom Layer w7.8: U15.19@14144.09,8219.37 14146.17,8221.45 14146.17,8249.95 14302.98,8406.76 14541.43,8406.76 14659.27,8288.92 14918.48,8288.92 14942.02,8312.46 14942.02,8333.83 U16.19@14944.1,8335.91 14944.1,8362.38 14850.87,8455.6 v1(14830,8455.6) ; v1(16206.73,8413.27) 16325.6,8532.14 16325.6,8926.61 16516.62,9117.62 U2.22@16516.62,9170
AB2: U2.20 U15.18 U16.18 | length 3465
  Top Layer w7.8: v1(14830,8417.8) 14878.12,8369.68 16216.6,8369.68 v1(16233.46,8386.54)
  Bottom Layer w7.8: U15.18@14124.41,8219.37 14126.49,8221.45 14126.49,8252.32 14296.52,8422.36 14547.89,8422.36 14665.73,8304.52 14912.02,8304.52 14922.33,8314.83 14922.33,8333.83 U16.18@14924.41,8335.91 14924.41,8360 14866.61,8417.8 v1(14830,8417.8) ; v1(16233.46,8386.54) 16341.2,8494.29 16341.2,8905.21 16555.99,9120 U2.20@16555.99,9170
AB3: U2.19 U15.17 U16.17 | length 3432.8
  Top Layer w7.8: v1(14830,8380) 14860,8350 15900,8350 15904.08,8354.08 16254.46,8354.08 v1(16260.19,8359.81)
  Bottom Layer w7.8: U15.17@14104.72,8219.37 14104.72,8252.62 14290.06,8437.96 14554.35,8437.96 14656.4,8335.91 U16.17@14904.73,8335.91 14860.63,8380 v1(14830,8380) ; v1(16260.19,8359.81) 16356.8,8456.43 16356.8,8898.75 16575.67,9117.62 U2.19@16575.67,9170
AB4: U2.17 U15.16 U16.16 | length 4575.6
  Top Layer w7.8: v1(16430,7970) v1(16550,7970)
  Bottom Layer w7.8: U15.16@14106.8,7677.92 14106.8,7649.42 14232.41,7523.81 14846.54,7523.81 14902.72,7580 U16.16@14904.73,7580 14904.73,7512.9 15023.63,7394 15514.62,7394 15606,7485.38 15606,8086 15610,8090 16310,8090 v1(16430,7970) ; v1@16553.21,7973.21 16553.21,8300 16615.04,8361.83 U2.17@16615.04,9170
AB5: U2.16 U15.15 U16.15 | length 4572.5
  Top Layer w7.8: v1(16430,8007.8) 16492.2,8007.8 16500,8000 v1(16590,8000)
  Bottom Layer w7.8: U15.15@14124.41,7680 14126.49,7677.92 14126.49,7651.8 14238.87,7539.41 14825.46,7539.41 14897.43,7611.39 14912.02,7611.39 14922.33,7601.07 14922.33,7582.08 U16.15@14924.41,7580 14924.41,7515.28 15030.09,7409.6 15508.16,7409.6 15590.4,7491.84 15590.4,8092.46 15603.54,8105.6 16332.2,8105.6 v1(16430,8007.8) ; v1@16591.01,8001.01 16591.01,8300 16634.73,8343.72 U2.16@16634.73,9170
AB6: U2.14 U15.14 U16.14 | length 4549.7
  Top Layer w7.8: v1(16430,8045.6) 16484.4,8045.6 16500,8030 v1(16630,8030)
  Bottom Layer w7.8: U15.14@14144.09,7680 14146.17,7677.92 14146.17,7654.17 14245.33,7555.01 14819,7555.01 14890.97,7626.99 14918.48,7626.99 14942.02,7603.45 14942.02,7582.08 U16.14@14944.1,7580 14944.1,7517.66 15036.55,7425.2 15501.69,7425.2 15574.8,7498.31 15574.8,8098.92 15597.08,8121.2 16354.4,8121.2 v1(16430,8045.6) ; v1@16630.38,8030.38 16630.38,8300 16674.1,8343.72 U2.14@16674.1,9170
AB7: U2.13 U15.13 U16.13 | length 4517.2
  Top Layer w7.8: v1(16430,8083.4) 16476.6,8083.4 16500,8060 v1(16670,8060)
  Bottom Layer w7.8: U15.13@14163.78,7680 14165.86,7677.92 14165.86,7656.55 14251.8,7570.61 14812.54,7570.61 14884.51,7642.59 14924.94,7642.59 14961.7,7605.83 14961.7,7582.08 U16.13@14963.78,7580 14963.78,7520.03 15043.01,7440.8 15495.23,7440.8 15559.2,7504.77 15559.2,8105.39 15590.61,8136.8 16376.6,8136.8 v1(16430,8083.4) ; v1@16668.18,8061.82 16668.18,8300 16693.78,8325.6 U2.13@16693.78,9170
AB8: U2.12 U15.3 U16.3 | length 4186.5
  Top Layer w7.8: v1(16430,8278.72) 16498.72,8210 v1(16700,8210)
  Bottom Layer w7.8: U15.3@14362.71,7677.92 14362.71,7653.09 14382.79,7633.01 14786.69,7633.01 14858.66,7704.99 15107.99,7704.99 15158.55,7654.42 15158.55,7582.08 U16.3@15160.63,7580 15160.63,7555.17 15197,7518.8 15462.92,7518.8 15481.2,7537.08 15481.2,8137.69 15558.31,8214.8 16366.08,8214.8 v1(16430,8278.72) ; v1@16705.98,8215.98 16705.98,8300 16713.47,8307.49 U2.12@16713.47,9170
AB9: U2.11 U15.2 U16.2 | length 4188.7
  Top Layer w7.8: v1(16430,8316.52) 16456.7,8289.78 16456.7,8283.3 16500,8240 v1(16740,8240)
  Bottom Layer w7.8: U15.2@14382.39,7677.92 14382.39,7655.47 14389.25,7648.61 14780.23,7648.61 14852.2,7720.59 15114.45,7720.59 15178.24,7656.8 15178.24,7582.08 U16.2@15180.32,7580 15182.32,7577.99 15182.32,7555.54 15203.46,7534.4 15456.46,7534.4 15465.6,7543.54 15465.6,8144.16 15551.84,8230.4 16343.88,8230.4 v1(16430,8316.52) ; U2.11@16733.15,9170 16733.15,9120 16743.78,9109.37 v1@16743.78,8243.78
AB10: U2.9 U15.31 U16.31 | length 3597.7
  Top Layer w7.8: v1(16430,8400) 16460,8370 16460,8346.34 16500,8306.34 16500,8300 v1(16783.15,8300)
  Bottom Layer w7.8: U15.31@14380.31,8238.36 14392.71,8250.76 14476.81,8250.76 14594.65,8132.92 15062.92,8132.92 15192.71,8262.71 15192.71,8304.52 ; 15178.31,8314.91 15178.31,8333.9 U16.31@15180.32,8335.91 ; U16.31@15180.32,8316.91 15192.71,8304.52 ; v1(16430,8400) 16300,8270 15550,8270 15510.11,8309.89 15212.66,8309.89 15207.29,8304.52 15192.71,8304.52 ; U2.9@16772.52,9170 16772.52,8310.63 v1(16783.15,8300)
AB11: U2.8 U15.1 U16.1 | length 4204.8
  Top Layer w7.8: v1(16430,8354.32) 16456.7,8327.58 16456.7,8313.3 16500,8270 v1(16820,8270)
  Bottom Layer w7.8: U15.1@14400,7680 14789.55,7680 14845.74,7736.19 15120.91,7736.19 15197.92,7659.17 15197.92,7582.08 U16.1@15200,7580 15230,7550 15450,7550 15450,8150.62 15545.38,8246 16321.68,8246 v1(16430,8354.32) ; U2.8@16792.21,9170 16792.21,8328.74 16820.95,8300 v1@16820.95,8270.95
AB12: U2.6 U15.12 U16.12 | length 4646.7
  Top Layer w7.8: v1(16430,8127.52) 16462.48,8127.52 16500,8090 v1(16860,8090)
  Bottom Layer w7.8: U15.12@14183.46,7680 14185.54,7677.92 14185.54,7658.93 14258.26,7586.21 14806.08,7586.21 14878.05,7658.19 14931.4,7658.19 14981.39,7608.2 14981.39,7582.08 U16.12@14983.47,7580 14983.47,7522.41 15049.48,7456.4 15488.77,7456.4 15543.6,7511.23 15543.6,8111.85 15584.15,8152.4 16405.12,8152.4 v1(16430,8127.52) ; U2.6@16831.58,9170 16831.58,8328.74 16860,8300.32 v1(16860,8090)
AB13: U2.5 U15.4 U16.4 | length 4454.7
  Top Layer w7.8: v1(16430,8240.92) 16490.92,8180 v1(16900,8180)
  Bottom Layer w7.8: U15.4@14343.02,7677.92 14343.02,7650.72 14376.32,7617.41 14793.15,7617.41 14865.13,7689.39 15101.53,7689.39 15138.87,7652.05 15138.87,7582.08 U16.4@15140.95,7580 15140.95,7552.79 15190.54,7503.2 15469.39,7503.2 15496.8,7530.61 15496.8,8131.23 15564.77,8199.2 16388.28,8199.2 v1(16430,8240.92) ; U2.5@16851.26,9170 16851.26,8346.86 16900,8298.12 v1(16900,8180)
AB14: U2.3 U15.5 U16.11 | length 4538.8
  Top Layer w7.8: v1(16430,8165.32) 16454.68,8165.32 16500,8120 v1(16940,8120)
  Bottom Layer w7.8: U15.5@14321.26,7661.01 14321.26,7650.42 14369.86,7601.81 14799.62,7601.81 14871.59,7673.79 14937.87,7673.79 15001.07,7610.58 15001.07,7582.08 U16.11@15003.15,7580 15003.15,7524.79 15055.94,7472 15482.31,7472 15528,7517.69 15528,8118.31 15577.69,8168 16427.32,8168 v1(16430,8165.32) ; U2.3@16890.63,9170 16890.63,8346.86 16937.49,8300 v1@16937.49,8122.51
AB15: U2.2 U15.11 U16.7 | length 4827.7
  Top Layer w7.8: v1(14160,7760) 14160,7755.07 14255.19,7659.88 14255.19,7630.83 14372.93,7513.09 15070,7513.09 15070,7520 v1@15080,7530 ; v1(16430,8203.12) 16445.74,8203.12 16484.46,8164.4 16485.6,8164.4 16500,8150 v1(16980,8150)
  Bottom Layer w7.8: v1(14160,7760) 14160,7750 14203.15,7706.85 U15.11@14203.15,7680 ; v1(15080,7520) 15112.4,7487.6 15475.85,7487.6 15512.4,7524.15 15512.4,8124.77 15571.23,8183.6 16410.48,8183.6 v1(16430,8203.12) ; v1@15080,7530 15081.89,7531.89 U16.7@15081.89,7580 ; U2.2@16910.32,9170 16910.32,8364.97 16975.29,8300 v1@16975.29,8154.71
ADCA0: U5.12 U20.37 | length 778.4
  Bottom Layer w7.8: U5.12@17453.47,9170 17453.47,9114.01 17954.41,8613.06 U20.37@17954.41,8599.06
ADCA1: U5.11 U20.38 | length 774.1
  Bottom Layer w7.8: U5.11@17473.15,9170 17473.15,9117.53 17971.03,8619.65 U20.38@17971.03,8602.12
ADCA2: U5.9 U20.39 | length 766
  Bottom Layer w7.8: U5.9@17512.52,9170 17512.52,9100.22 17990.72,8622.03 U20.39@17990.72,8602.12
ADCA3: U5.8 U20.40 | length 770.3
  Bottom Layer w7.8: U5.8@17532.21,9170 17532.21,9102.6 18010.4,8624.4 18010.4,8602.12 U20.40@18013.46,8599.06
ADCA4: U5.6 U20.41 | length 757.8
  Bottom Layer w7.8: U5.6@17571.58,9170 17571.58,9085.29 18030.09,8626.78 U20.41@18030.09,8602.12
ADCA5: U5.5 U20.42 | length 757.8
  Bottom Layer w7.8: U5.5@17591.26,9170 17591.26,9087.67 18049.77,8629.16 U20.42@18049.77,8602.12
ADCA6: U5.3 U20.43 | length 749.6
  Bottom Layer w7.8: U5.3@17630.63,9170 17630.63,9070.36 18069.46,8631.53 U20.43@18069.46,8602.12
ADCA7: U5.2 U20.44 | length 754
  Bottom Layer w7.8: U5.2@17650.32,9170 17650.32,9072.74 18092.2,8630.85 U20.44@18092.2,8599.06
ADCB0: U5.13 U20.24 | length 1144
  Bottom Layer w7.8: U5.13@17433.78,9170 17433.78,8747.82 17870,8311.6 17870,8310 17915.59,8264.41 U20.24@17954.41,8264.41
ADCB1: U5.14 U20.23 | length 1217.8
  Bottom Layer w7.8: U5.14@17414.1,9170 17414.1,8743.84 17920.98,8236.96 17964.18,8236.96 17974.09,8246.88 U20.23@17974.09,8264.41
ADCB2: U5.16 U20.22 | length 1281
  Bottom Layer w7.8: U5.16@17374.73,9170 17374.73,8761.15 17914.51,8221.36 17970.64,8221.36 17990.72,8241.44 17990.72,8261.35 U20.22@17993.78,8264.41
ADCB3: U5.17 U20.21 | length 1336.1
  Bottom Layer w7.8: U5.17@17355.04,9170 17355.04,8758.77 17908.05,8205.76 17977.1,8205.76 18010.4,8239.06 18010.4,8261.35 U20.21@18013.46,8264.41
ADCB4: U5.19 U20.20 | length 1399.3
  Bottom Layer w7.8: U5.19@17315.67,9170 17315.67,8776.08 17901.59,8190.16 17983.56,8190.16 18030.09,8236.68 18030.09,8261.35 U20.20@18033.15,8264.41
ADCB5: U5.20 U20.19 | length 1454.4
  Bottom Layer w7.8: U5.20@17295.99,9170 17295.99,8773.71 17895.13,8174.56 17990.02,8174.56 18049.77,8234.31 18049.77,8261.35 U20.19@18052.83,8264.41
ADCB6: U5.22 U20.18 | length 1513.3
  Bottom Layer w7.8: U5.22@17256.62,9170 17256.62,8791.01 17888.67,8158.96 17996.49,8158.96 18069.46,8231.93 U20.18@18069.46,8261.35
ADCB7: U5.23 U20.17 | length 1572.7
  Bottom Layer w7.8: U5.23@17236.93,9170 17236.93,8788.64 17882.21,8143.36 18002.95,8143.36 18092.2,8232.62 U20.17@18092.2,8264.41
ADCCLK: U7.2 U20.14 U20.47 | length 4512
  Top Layer w7.8: v1(15800,9190) 16146.01,9190 16196.01,9140 17880,9140 v1(17920,9180) ; v1(18150,8210) 18095.59,8264.41 17954.41,8264.41 17900,8318.82 17900,8544.65 17954.41,8599.06 18079.06,8599.06 v1(18150,8670)
  Bottom Layer w7.8: v1(15800,9190) 15790,9200 15790,9886.39 15801.21,9897.61 15837.92,9897.61 U7.2@15840,9899.68 ; v1(17920,9180) 17920,8847.85 18148.2,8619.65 U20.47@18148.2,8602.12 ; v1(18150,8210) 18150,8263.15 U20.14@18151.26,8264.41 ; 18150,8621.45 v1(18150,8670)
AGND: C54.1 C58.1 C59.1 C60.1 C61.2 C62.2 C64.1 C65.1 C67.2 C68.2 C69.1 C70.1 C71.1 C72.1 C73.1 C74.1 C75.1 C76.1 J5.2 J6.2 L1.2 P3.3 R85.2 R87.2 SW2.2 SW3.2 U19.3 U19.5 U20.1 U20.12 U20.16 U20.27 U20.29 U20.32 U20.34 U20.45 U23.1 U23.2 U23.13 U23.14 U23.PGND | length 9831.5
  Top Layer w8: C69.1@17780,8342.44 17822.44,8342.44 v1(17850,8370) ; C74.1@17780,8527.56 v1(17837.56,8527.56) ; C59.1@18757.56,8300 v1(18820,8300) ; C60.1@18757.56,8500 v1(18820,8500) ; SW2.2@19021.26,8161.26 19021.26,8131.18 R85.2@19072.44,8080 19107.87,8044.57 J5.2@19107.87,7700 ; v1(19310,9380) 19310,9410 19338.82,9438.82 U19.3@19370,9438.82 19365.07,9433.89 19341.76,9433.89 ; U19.5@19543.23,9413.23 19596.77,9413.23 v1(19650,9360) ; SW3.2@19721.26,8161.26 19721.26,8080 ; R87.2@19772.44,8080 19721.26,8080 ; J6.2@19990,7700 19990,7703.4 19721.26,7972.14 19721.26,8080
  Top Layer w30: L1.2@13147.56,7300 15540,7300 16010,7770 17450,7770 18170,7770 P3.3@18400,8000 ; C73.1@18160,8540 v1(18240,8620) ; v1(18930,9180) v1(19030,9080) ; C75.1@19100,9522.44 v1(19167.56,9522.44) ; v1(19142.44,8912.44) C61.2@19142.44,9020 C67.2@19142.44,9100 ; v1(19450,9230) 19630,9230 v1(19670,9270) ; v1(19540,9370) 19550,9360 v1(19650,9360) ; v1(19767.56,8917.56) C64.1@19767.56,9050 C68.2@19767.56,9120 ; C76.1@19790,9522.44 19822.44,9490 v1(19890,9490)
  Top Layer w50: C73.1@18160,8540 v1(18090,8540) 17960,8540 v1(17960,8520) v1(17960,8340) 17970,8330 v1(18090,8330) 18140,8330 v1(18170,8360) C72.1@18170,8402.76
  Bottom Layer w8: v1(17837.56,8527.56) 17864.49,8500.63 U20.34@17895.35,8500.63 17937.86,8500.63 17957.23,8520 v1(17960,8520) ; v1(17850,8370) 17854.2,8365.8 U20.27@17892.39,8365.8 ; U20.27@17895.35,8362.84 17936.92,8362.84 17959.75,8340 v1(17960,8340) ; U20.29@17895.35,8402.21 v1(17957.79,8402.21) ; U20.32@17895.35,8461.26 v1(17958.74,8461.26) ; v1(18090,8330) 18111.89,8308.11 U20.16@18111.89,8264.41 ; v1(18090,8540) 18111.89,8561.89 U20.45@18111.89,8599.06 ; v1(18170,8360) 18206.53,8323.47 U20.12@18230,8323.47 ; U20.1@18230,8540 18230,8610 v1(18240,8620) ; v1(19450,9230) U23.1@19560,9230
  other v1: 17950,7770 18050,7770 18150,7770
CLK0: JP7.3 U4.31 X1.3 | length 1969
  Top Layer w7.8: v1(17808.97,10338.97) 17767.7,10380.24 17767.7,10729.76 17940,10902.06 v1(17940,11310)
  Bottom Layer w7.8: U4.31@17720,10339.45 17808.49,10339.45 v1(17808.97,10338.97) ; v1(17940,11310) 18110,11480 18110,11600 ; JP7.3@18150,11900 18110,11860 18110,11600 ; X1.3@18235.43,11643.31 18192.13,11600 18110,11600
CLK1: JP7.2 U4.32 | length 2132.2
  Top Layer w7.8: v1(17850,10340) 17783.3,10406.7 17783.3,10721.06 17980,10917.76 v1(17980,11270)
  Bottom Layer w7.8: U4.32@17720,10319.76 17790.41,10319.76 17797.91,10312.27 17822.27,10312.27 v1(17850,10340) ; v1(17980,11270) 17942.24,11270 17913.3,11298.94 17913.3,11323.3 18090,11500 18090,11902.46 18128.77,11941.23 18167.08,11941.23 18208.3,11900 JP7.2@18250,11900